# Altium PCB AD9959-pcb.PcbDoc (part 1 of 2)
Units mil, origin at the board's own origin, x right, y up, seen from the top; angles counter-clockwise.
Board outline 3551.25 x 2369.11 mil, 2 copper layers (Top Layer, Bottom Layer); 146 components, 90 nets, 422 pads, 640 vias.
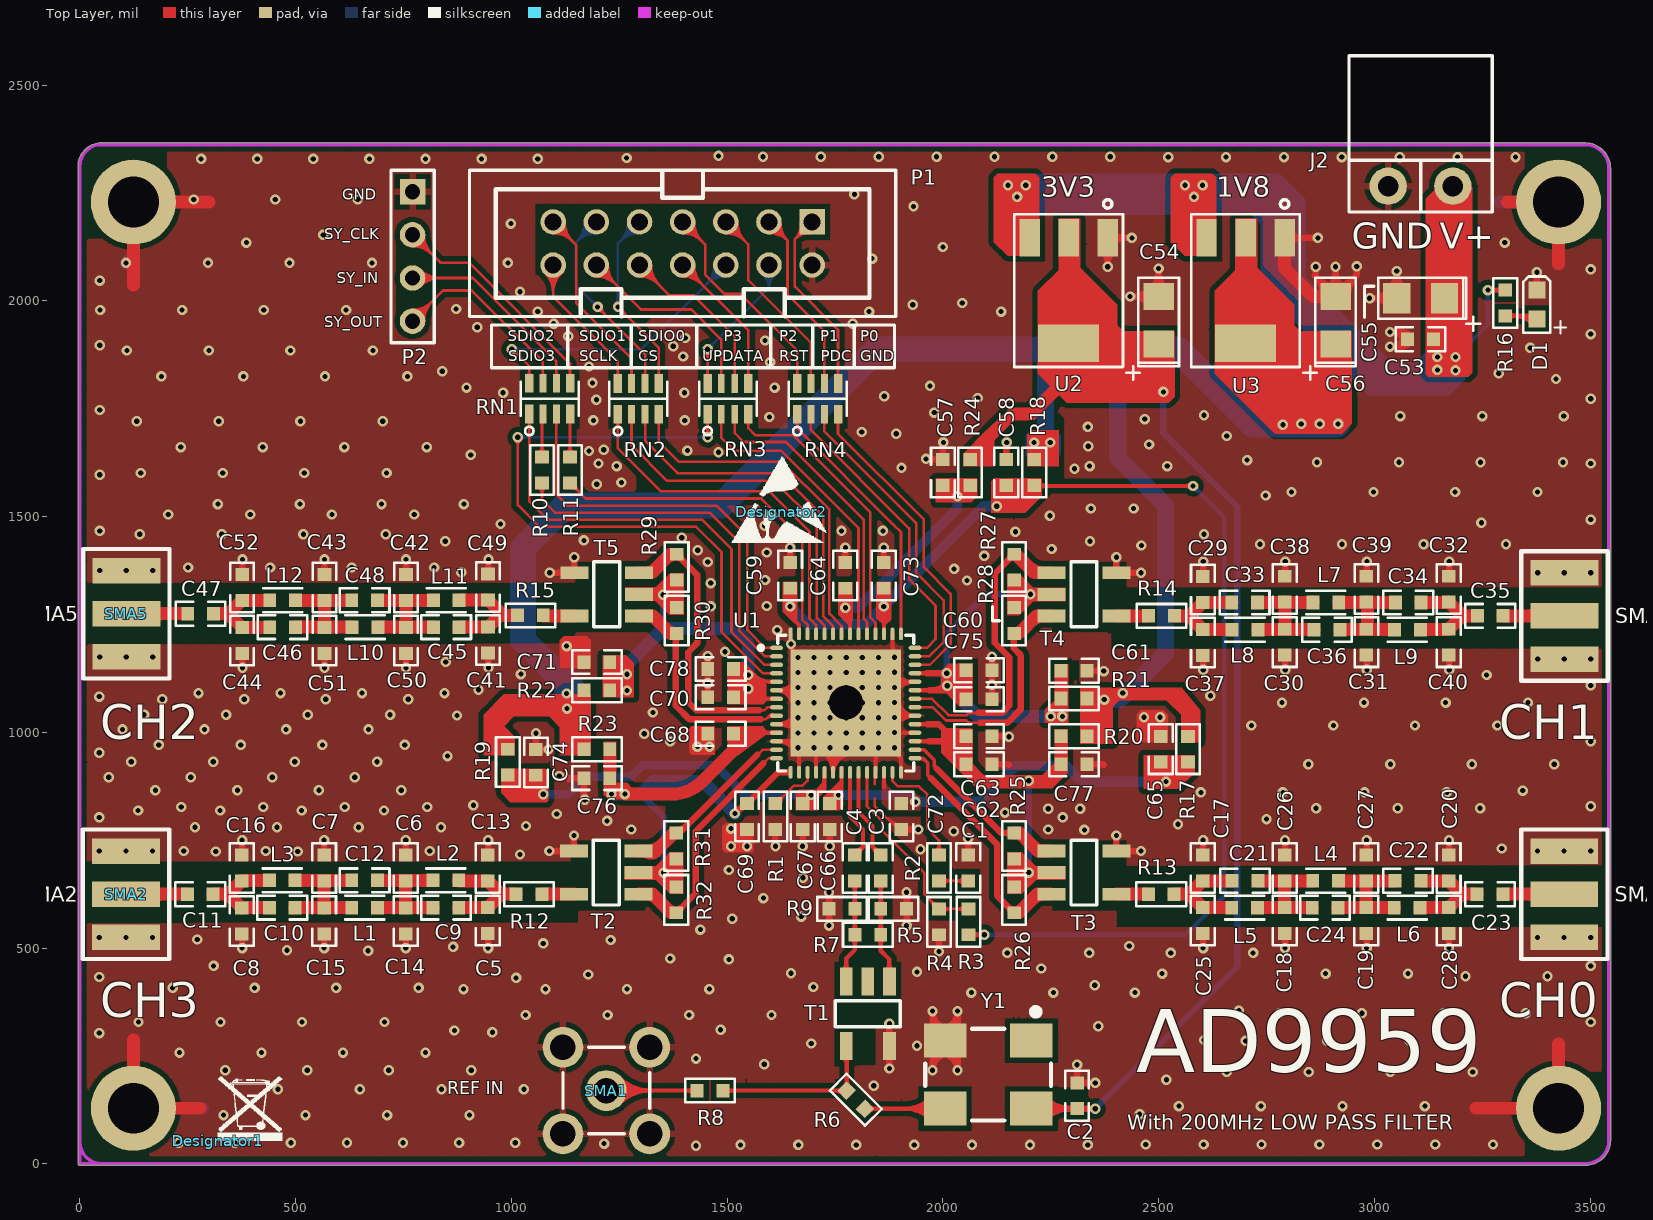
[diagram p0: Top Layer view]
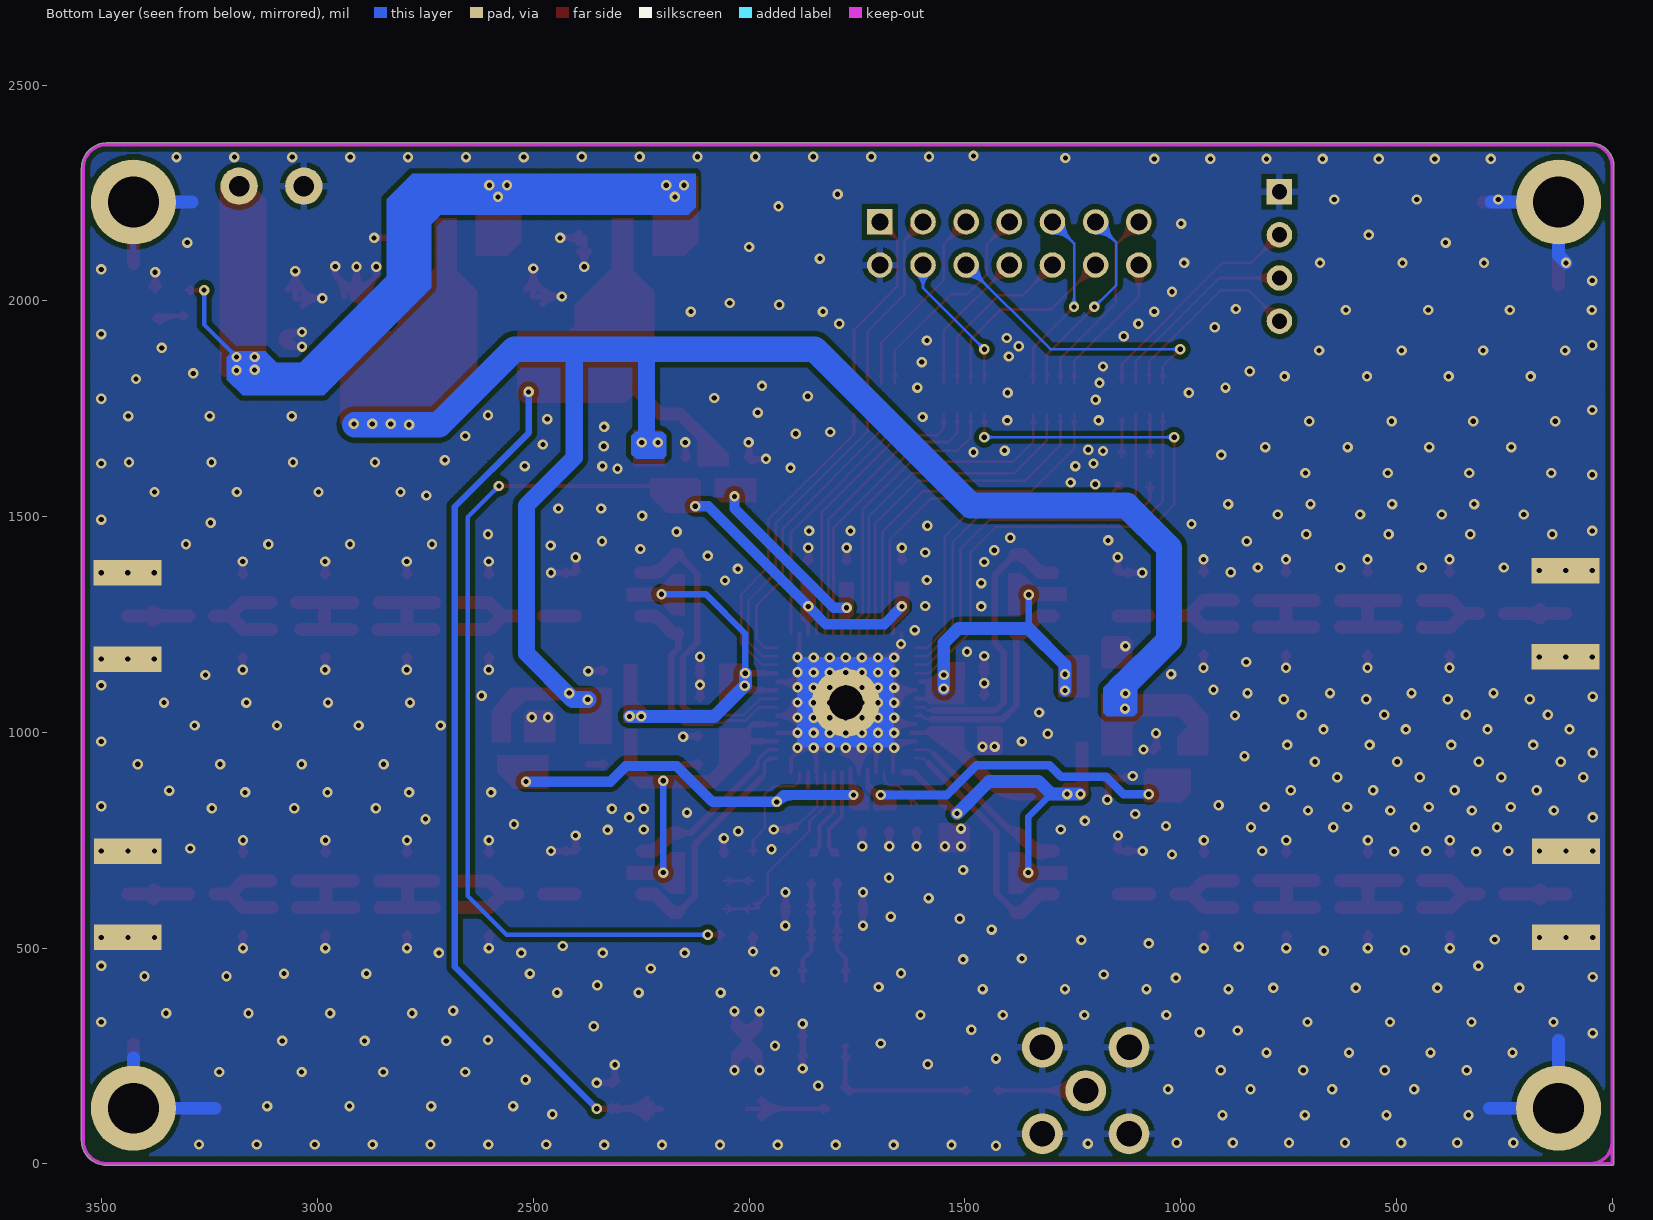
[diagram p1: Bottom Layer view, seen from below]

## Layer stack, top to bottom
Top Solder: solder mask 0.4, Solder Resist, Dk 3.5
Top Layer: signal copper 1.4
Dielectric1: dielectric 12.6, FR-4, Dk 4.8
Bottom Layer: signal copper 1.4
Bottom Solder: solder mask 0.4, Solder Resist, Dk 3.5

## Board outline
-3.95,1 -3.95,2310 cw(c0,2310) -3.8,2311.1 cw(c0,2312.2) -3.95,2312.2 cw(c50,2312.2) 50,2366.16 cw(c50,2362.2) 51.1,2366 cw(c52.2,2362.2) 52.2,2366.16 3487.8,2366.16 cw(c3487.8,2362.2) 3488.9,2366 cw(c3490,2362.2) 3490.14,2366.15 cw(c3488.05,2306.95) 3547.29,2306.95 cw(c3488.05,2306.95) 3547.26,2304.93 3547.26,55.01 cw(c3489.65,54.65) 3547.26,54.65 cw(c3489.65,54.65) 3490.03,-2.95 cw(c3490,1) 3490,-2.95 0,-2.95 cw(c0,1)

## Design rules (kind name [scope] priority, off if disabled: settings)
Clearance Clearance_POLY [inpolygon] p1: gap=12 ignorepadtopadclearanceinfootprint=FALSE except(0: Arc-Hole Track-Hole SMDPad-Hole THPad-Hole Via-Hole Fill-Hole Poly-Hole Region-Hole Text-Hole)
Clearance [All] p2: gap=6 ignorepadtopadclearanceinfootprint=FALSE except(0: Arc-Hole Track-Hole SMDPad-Hole THPad-Hole Via-Hole Fill-Hole Poly-Hole Region-Hole Text-Hole)
PolygonConnect PolygonConnect_direct [isvia or InSMTComponent] p1: connectstyle=Direct reliefconductorwidth=10 reliefentries=4 polygonreliefangle="90 Angle" airgapwidth=10
PolygonConnect [All] p2: connectstyle=Relief reliefconductorwidth=15 reliefentries=4 polygonreliefangle="90 Angle" airgapwidth=10
RoomDefinition QFN [InComponentClass('Components Class 1')] p1: confinementstyle=ConfineIn formatcopy=TRUE lockcomponents=FALSE outline 1462,1367 2089,1367 2089,812 1462,812
RoutingVias [All] p1: holewidth=12 width=24 viastyle="Through Hole" minholewidth=12 minwidth=24 maxholewidth=12 maxwidth=24
SilkToSolderMaskClearance SilkscreenOverComponentPads [IsPad] p1: minsilkscreentomaskgap=10 clearancetoexposedcopper=TRUE
SolderMaskExpansion [All] p1: expansion=2.5 istentingtop=FALSE
Width Width_POWER [InNetClass('POWER')] p1: maxlimit=60 minlimit=6 preferedwidth=15
Width [All] p2: maxlimit=60 minlimit=6 preferedwidth=6
29 further rules are at their usual default settings.

## Classes and differential pairs
component class "Components Class 1": U1
component class "Room Definition 4": C17 C18 C19 C20 C21 C22 C23 C24 C25 C26 C27 C28 L4 L5 L6 R13 R25 R26 SMA3 T3
component class "Room Definition 3": C41 C42 C43 C44 C45 C46 C47 C48 C49 C50 C51 C52 L10 L11 L12 R15 R29 R30 SMA5 T5
component class "Room Definition 2": C29 C30 C31 C32 C33 C34 C35 C36 C37 C38 C39 C40 L7 L8 L9 R14 R27 R28 SMA4 T4
component class "Room Definition 1": C5 C6 C7 C8 C9 C10 C11 C12 C13 C14 C15 C16 L1 L2 L3 R12 R31 R32 SMA2 T2
net class POWER: AGND AVDD0 AVDD1 AVDD2 AVDD3 BG_VDD CLK_VDD DVDD DVDD/IO VCC_1V8 VCC_3V3 VIN
component class 04-POWER: C53 C54 C55 C56 C57 C58 C59 C60 C61 C62 C63 C64 C65 C66 C67 C68 C69 C70 C71 C72 C73 C74 C75 C76 C77 C78 D1 J2 R16 R17 R18 R19 R20 R21 R22 R23 R24 R25 R26 R27 R28 R29 R30 R31 R32 U2 U3
component class "03-LP Filter": C17 C18 C19 C20 C21 C22 C23 C24 C25 C26 C27 C28 C29 C30 C31 C32 C33 C34 C35 C36 C37 C38 C39 C40 C41 C42 C43 C44 C45 C46 C47 C48 C49 C50 C51 C52 L4 L5 L6 L7 L8 L9 L10 L11 L12 R13 R14 R15 SMA3 SMA4 SMA5 T3 T4 T5
component class 02-I_O: C5 C6 C7 C8 C9 C10 C11 C12 C13 C14 C15 C16 L1 L2 L3 P1 P2 R10 R11 R12 RN1 RN2 RN3 RN4 SMA2 T2
component class 01-MCU: C1 C2 C3 C4 R1 R2 R3 R4 R5 R6 R7 R8 R9 SMA1 T1 U1 Y1

## Components (designator, comment, footprint, x,y, rotation, side; value= is the part's Value field where it differs from the comment)
C1 "680pf" 0603C 2058.56,685.92 r90 top
C2 "100nf" 0603C 2311,157.92 r270 top
C3 "100nf" 0603C 1856,685.92 r90 top
C4 "100nf" 0603C 1796,685.92 r90 top
C5 "8.2pF" 0603C 945.08,564 r90 top
C6 "12pF" 0603C 755.08,686 r270 top
C7 "10pF" 0603C 566.08,686 r270 top
C8 "5pF" 0603C 375.08,563.08 r90 top
C9 "0.75pF" 0603C 848.16,594 r180 top
C10 "10pF" 0603C 469.08,594 r180 top
C11 "1uF" 0603C 279.08,625 r180 top
C12 "5pF" 0603C 660.08,657 r180 top
C13 "8.2pF" 0603C 945.08,686 r90 top
C14 "12pF" 0603C 755.08,563.08 r90 top
C15 "10pF" 0603C 566.08,563.08 r90 top
C16 "5pF" 0603C 375.08,686 r270 top
C17 "8.2pF" 0603C 2602,686 r270 top
C18 "12pF" 0603C 2792,564 r90 top
C19 "10pF" 0603C 2981,564 r90 top
C20 "5pF" 0603C 3172,686 r270 top
C21 "0.75pF" 0603C 2699.92,656 r0 top
C22 "10pF" 0603C 3078,656 r0 top
C23 "1uF" 0603C 3268,625 r0 top
C24 "5pF" 0603C 2885.92,594 r0 top
C25 "8.2pF" 0603C 2602,564 r270 top
C26 "12pF" 0603C 2792,686 r270 top
C27 "10pF" 0603C 2981,686 r270 top
C28 "5pF" 0603C 3172,564 r90 top
C29 "8.2pF" 0603C 2602.51,1331 r270 top
C30 "12pF" 0603C 2792.51,1209 r90 top
C31 "10pF" 0603C 2981.51,1209 r90 top
C32 "5pF" 0603C 3172.51,1331.92 r270 top
C33 "0.75pF" 0603C 2699.43,1301 r0 top
C34 "10pF" 0603C 3078.51,1301 r0 top
C35 "1uF" 0603C 3268.51,1270 r0 top
C36 "5pF" 0603C 2889.92,1238 r0 top
C37 "8.2pF" 0603C 2602.51,1208.08 r270 top
C38 "12pF" 0603C 2792.51,1331.92 r270 top
C39 "10pF" 0603C 2981.51,1331.92 r270 top
C40 "5pF" 0603C 3172.51,1209 r90 top
C41 "8.2pF" 0603C 945.95,1214 r90 top
C42 "12pF" 0603C 755.95,1336 r270 top
C43 "10pF" 0603C 566.95,1336 r270 top
C44 "5pF" 0603C 375.95,1213.08 r90 top
C45 "0.75pF" 0603C 849.03,1244 r180 top
C46 "10pF" 0603C 469.95,1244 r180 top
C47 "1uF" 0603C 279.95,1275 r180 top
C48 "5pF" 0603C 660.08,1306 r180 top
C49 "8.2pF" 0603C 945.95,1336.92 r90 top
C50 "12pF" 0603C 755.95,1213.08 r90 top
C51 "10pF" 0603C 566.95,1213.08 r90 top
C52 "5pF" 0603C 375.95,1336 r270 top
C53 "100nf" 0603C 3107,1911 r180 top
C54 "22uF" 1206T 2500,1955 r90 top
C55 "22uF" 1206T 3107,2006 r180 top
C56 "22uF" 1206T 2910,1955 r90 top
C57 "100nf" 0603C 2000,1602 r90 top
C58 "100nf" 0603C 2147,1602 r90 top
C59 "100nf" 0603C 1646,1363.92 r90 top
C60 "100nf" 0603C 2083.92,1144 r0 top
C61 "100nf" 0603C 2303.92,1143 r0 top
C62 "100nf" 0603C 2083.92,926 r0 top
C63 "100nf" 0603C 2083.92,991 r0 top
C64 "100nf" 0603C 1774,1363.92 r90 top
C65 "100nf" 0603C 2505,961 r90 top
C66 "100nf" 0603C 1738,805 r270 top
C67 "100nf" 0603C 1675,805 r270 top
C68 "100nf" 0603C 1485.08,997 r180 top
C69 "100nf" 0603C 1546,805 r270 top
C70 "100nf" 0603C 1485.08,1081.51 r180 top
C71 "100nf" 0603C 1198.08,1163 r180 top
C72 "100nf" 0603C 1904,805 r270 top
C73 "100nf" 0603C 1863,1363.92 r90 top
C74 "100nf" 0603C 1057,930.57 r90 top
C75 "100nf" 0603C 2083.92,1077 r0 top
C76 "100nf" 0603C 1198.08,894 r180 top
C77 "100nf" 0603C 2303.92,926 r0 top
C78 "100nf" 0603C 1485.08,1147 r180 top
D1 "LED" 0603D 3376.49,1991.51 r270 top
Designator1 "Comment" 0-WEEE 320,54 r0 top
Designator2 "Comment" "0-ESD Protect" 1626,1511 r0 top
J2 "PWR_IN" KF2EDG_3R81_2P 3107,2266 r0 top
L1 "47nH" 0603L 660.08,594 r180 top
L2 "56nH" 0603L 848.08,657 r180 top
L3 "33nH" 0603L 469.08,657 r180 top
L4 "47nH" 0603L 2887,656 r0 top
L5 "56nH" 0603L 2699.41,594 r0 top
L6 "33nH" 0603L 3076,594 r0 top
L7 "47nH" 0603L 2887.51,1301 r0 top
L8 "56nH" 0603L 2700,1238 r0 top
L9 "33nH" 0603L 3076.51,1238 r0 top
L10 "47nH" 0603L 660.95,1244 r180 top
L11 "56nH" 0603L 849.08,1306 r180 top
L12 "33nH" 0603L 470.08,1306 r180 top
P1 "Header 7X2" CON20VP2R54-2X7TM-1 1397,2133 r180 top
P2 "Header 4" HDR1X4 771,2253 r270 top
R1 "1.8K" 0603R 1612,805 r90 top
R2 "0R" 0603R 1991,685.92 r270 top
R3 "0R" 0603R 2059.46,561 r90 top
R4 "NC" 0603R 1991,561 r90 top
R5 "24.9R" 0603R 1885.92,590.92 r0 top
R6 "0R" 0603R 1798.16,148.84 r135 top
R7 "49.9R" 0603R 1826.08,531.08 r0 top
R8 "0R" 0603R 1460.08,170 r0 top
R9 "24.9R" 0603R 1766.08,590.92 r0 top
R10 "0R" 0603R 1071,1608.08 r270 top
R11 "0R" 0603R 1136,1608 r270 top
R12 "0R" 0603R 1041,625 r180 top
R13 "0R" 0603R 2506.08,625 r0 top
R14 "0R" 0603R 2506.59,1270 r0 top
R15 "0R" 0603R 1044,1271 r180 top
R16 "510R" 0603R 3303,1995.08 r90 top
R17 "0R" 0603R 2568,961 r90 top
R18 "0R" 0603R 2212,1602 r90 top
R19 "0R" 0603R 992,931 r90 top
R20 "0R" 0603R 2303.92,991 r0 top
R21 "0R" 0603R 2303.92,1078.49 r0 top
R22 "0R" 0603R 1198.08,1097.56 r180 top
R23 "0R" 0603R 1198.08,961 r180 top
R24 "0R" 0603R 2063,1602 r90 top
R25 "49.9R" 0603R 2165,736.92 r90 top
R26 "49.9R" 0603R 2165,612 r270 top
R27 "49.9R" 0603R 2165,1382.92 r90 top
R28 "49.9R" 0603R 2165,1259.08 r270 top
R29 "49.9R" 0603R 1382.95,1382.92 r90 top
R30 "49.9R" 0603R 1382.95,1259.08 r270 top
R31 "49.9R" 0603R 1382.08,736.92 r90 top
R32 "49.9R" 0603R 1382.08,612 r270 top
RN1 "51r" 0603RA 1088.76,1773.43 r0 top
RN2 "51r" 0603RA 1294.11,1773 r0 top
RN3 "51r" 0603RA 1501.96,1773 r0 top
RN4 "51r" 0603RA 1709.81,1773 r0 top
SMA1 "REF CLK" CON10-5R1X5R1 1220,170 r0 top
SMA2 "CH3" SMA-SMD 107.08,625 r270 top
SMA3 "CH0" SMA-SMD 3440,625 r90 top
SMA4 "CH1" SMA-SMD 3440.51,1270 r90 top
SMA5 "CH2" SMA-SMD 107.95,1275 r270 top
T1 "ETC1-1-13" SM-22 1826,348 r180 top
T2 "TC1-1T+" at224-1a 1220.08,675 r270 top
T3 "TC1-1T+" at224-1a 2327,675 r90 top
T4 "TC1-1T+" at224-1a 2327,1320 r90 top
T5 "TC1-1T+" at224-1a 1220.95,1320 r270 top
U1 "AD9958PCBZ" QFN50P800X800X100-56M 1775,1068 r0 top
U2 "AMS1117-3V3" SOT223 2291.45,2023.95 r180 top
U3 "AMS1117-1V8" SOT223 2701.45,2023.95 r180 top
Y1 "100MHz" XTAL-SMD-7050_4P 2105,206.74 r180 top

## Footprints (in the part's own frame and the unit in brackets; to place one, negate y for a bottom-side part, rotate by r counter-clockwise, add the part's x,y. Pads: shape width x height; smd on the part's side, far side on the other; paste and mask are expansions set on the pad)
"0-ESD Protect" [mil]
  silkscreen extent -115,-70 104,128
0-WEEE [mil] "WEEE"
  silkscreen extent 0,0 150,148
0603C [mm]
  rect 0.76x0.8 smd: 1(-0.76,0) 2(0.76,0)
  silkscreen extent -1.46,-0.7 1.46,0.7
0603D [mm]
  rect 1x1 smd: 1(0.85,0) 2(-0.85,0)
  silkscreen extent -1.65,-0.8 1.65,0.8
0603L [mm]
  rect 0.76x0.8 smd: 1(-0.76,0) 2(0.76,0)
  silkscreen extent -1.15,-0.7 1.15,0.7
0603R [mm]
  rect 0.76x0.8 smd: 1(-0.76,0) 2(0.76,0)
  silkscreen extent -1.46,-0.7 1.46,0.7
0603RA [mm]
  rect 0.5x1.1 smd: 1(-1.2,-0.9) 4(1.2,-0.9) 5(1.2,0.9) 8(-1.2,0.9)
  rect 0.4x1.1 smd: 2(-0.4,-0.9) 3(0.4,-0.9) 6(0.4,0.9) 7(-0.4,0.9)
  silkscreen extent -1.7,-2.15 1.7,1
1206T [mm]
  rect 1.6x1.8 smd: 1(-1.4,0) 2(1.4,0)
  silkscreen extent -3.5,-1.2 2.5,1.9
at224-1a [mm] "RF Transformer"
  rect 0.76x1.65 smd: 1(-1.27,1.905) 2(0,1.905) 3(1.27,1.905) 4(-1.27,-1.905) 6(1.27,-1.905)
  silkscreen extent -1.91,-0.76 1.91,0.76
CON10-5R1X5R1 [mm]
  round 2.4 hole 1.5: 1(0,0) 2(-2.55,2.55) 3(-2.55,-2.55) 4(2.55,2.55) 5(2.55,-2.55)
  silkscreen extent -2.55,-2.55 2.55,2.55
CON20VP2R54-2X7TM-1 [mm]
  rect 1.5x1.5 hole 1: 1(-7.62,-1.27)
  round 1.5 hole 1: 2(-7.62,1.27) 3(-5.08,-1.27) 4(-5.08,1.27) 5(-2.54,-1.27) 6(-2.54,1.27) 7(0,-1.27) 8(0,1.27) 9(2.54,-1.27) 10(2.54,1.27) 11(5.08,-1.27) 12(5.08,1.27) 13(7.62,-1.27) 14(7.62,1.27)
  silkscreen extent -12.55,-4.3 12.55,4.3
HDR1X4 [mm] "Connector; Header; 4 Position"
  rect 1.5x1.5 hole 0.9: 1(0,0)
  round 1.5 hole 0.9: 2(2.54,0) 3(5.08,0) 4(7.62,0)
  silkscreen extent -1.27,-1.27 8.89,1.27
KF2EDG_3R81_2P [mm]
  round 2.2 hole 1.2: 1(-1.905,0) 2(1.905,0)
  silkscreen extent -4.21,-1.52 4.21,7.68
QFN50P800X800X100-56M [mm] "QFN, 56-Leads, Body 8.0x8.0mm (max), Pitch 0.50mm, IPC Low Density"
  oval 0.75x0.25 smd: 1(-4.075,3.25) 2(-4.075,2.75) 3(-4.075,2.25) 4(-4.075,1.75) 5(-4.075,1.25) 6(-4.075,0.75) 7(-4.075,0.25) 8(-4.075,-0.25) 9(-4.075,-0.75) 10(-4.075,-1.25) 11(-4.075,-1.75) 12(-4.075,-2.25) 13(-4.075,-2.75) 14(-4.075,-3.25) 29(4.075,-3.25) 30(4.075,-2.75) 31(4.075,-2.25) 32(4.075,-1.75) 33(4.075,-1.25) 34(4.075,-0.75) 35(4.075,-0.25) 36(4.075,0.25) 37(4.075,0.75) 38(4.075,1.25) 39(4.075,1.75) 40(4.075,2.25) 41(4.075,2.75) 42(4.075,3.25)
  oval 0.25x0.75 smd: 15(-3.25,-4.075) 16(-2.75,-4.075) 17(-2.25,-4.075) 18(-1.75,-4.075) 19(-1.25,-4.075) 20(-0.75,-4.075) 21(-0.25,-4.075) 22(0.25,-4.075) 23(0.75,-4.075) 24(1.25,-4.075) 25(1.75,-4.075) 26(2.25,-4.075) 27(2.75,-4.075) 28(3.25,-4.075) 43(3.25,4.075) 44(2.75,4.075) 45(2.25,4.075) 46(1.75,4.075) 47(1.25,4.075) 48(0.75,4.075) 49(0.25,4.075) 50(-0.25,4.075) 51(-0.75,4.075) 52(-1.25,4.075) 53(-1.75,4.075) 54(-2.25,4.075) 55(-2.75,4.075) 56(-3.25,4.075)
  rect 6.5x6.3 smd: 57(0,0)
  silkscreen extent -5.12,-4 4,4, body extent -4,-4 4,4, height 1
SM-22 [mm] "RF Transformer"
  rect 0.76x1.65 smd: 1(-1.27,-1.905) 2(0,-1.905) 3(1.27,-1.905) 4(1.27,1.905) 5(-1.27,1.905)
  silkscreen extent -1.91,-0.76 1.91,0.76
SMA-SMD [mm]
  rect 1.5x4 smd: 1(0,0) 2(-2.54,0) 2(2.54,0)
  rect 1.5x4 smd far side: 2(-2.54,0) 2(2.54,0)
  silkscreen extent -3.81,-2.54 3.81,2.54, body extent -3,-11.89 3,1.71, height 3.2
SOT223 [mm]
  rect 1.2x2.2 smd: 1(-2.3,-3.1) 2(0,-3.1) 3(2.3,-3.1)
  rect 3.6x2.2 smd: 4(0,3.1)
  silkscreen extent -3.2,-5.35 3.2,4.5
XTAL-SMD-7050_4P [mm]
  rect 2.5x2 smd: 1(-2.54,-2) 2(2.54,-2) 3(2.54,2) 4(-2.54,2)
  silkscreen extent -3.7,-3.9 3.7,2.7

## Part data
C1 C2 C3 C4 C5 C6 C7 C8 C9 C10 C11 C12 C13 C14 C15 C16 C17 C18 C19 C20 C21 C22 C23 C24 C25 C26 C27 C28 C29 C30 C31 C32 C33 C34 C35 C36 C37 C38 C39 C40 C41 C42 C43 C44 C45 C46 C47 C48 C49 C50 C51 C52 C53 C57 C58 C59 C60 C61 C62 C63 C64 C65 C66 C67 C68 C69 C70 C71 C72 C73 C74 C75 C76 C77 C78: library part "CAP NP"
C54 C55 C56: library part "CAP POL"
J2: library part "HEADER 2"
L1 L2 L3 L4 L5 L6 L7 L8 L9 L10 L11 L12: library part INDUCTANCE
P1: "Header, 7-Pin, Dual row"
P2: "Header, 4-Pin"
R1 R2 R3 R4 R5 R6 R7 R8 R9 R10 R11 R12 R13 R14 R15 R16 R17 R18 R19 R20 R21 R22 R23 R24 R25 R26 R27 R28 R29 R30 R31 R32: library part R
RN1 RN2 RN3 RN4: library part R_PACK_4
SMA1 SMA2 SMA3 SMA4 SMA5: library part BNC
U1: library part AD9958BCPZ_2
U3: library part AMS1117-3V3
Y1: library part XTAL_SMD

## Free pads (board coordinates)
  round 196.85 hole 118.11: 0(124,129) 0(124,2229) 0(3427,129) 0(3427,2229)
  round 157.48 hole 78.74: 0(1775.92,1068.74)

## Via types
v1: diameter 24, hole 12, Top Layer to Bottom Layer, tented both sides, 640 vias

## Nets (pads, with @x,y where several pads share a name; then routed paths per layer and width w, separated by ;. In a path a pad name is that pad's centre, name@x,y a point inside that pad or via, vN(x,y) a via of type N, cw(c..) or ccw(c..) an arc to the next point about the centre after c; other vN are vias at no path point)
AGND: C1.2 C2.1 C5.1 C6.1 C7.1 C8.1 C13.2 C14.1 C15.1 C16.1 C17.1 C18.1 C19.1 C20.1 C25.2 C26.1 C27.1 C28.1 C29.1 C30.1 C31.1 C32.1 C37.2 C38.1 C39.1 C40.1 C41.1 C42.1 C43.1 C44.1 C49.2 C50.1 C51.1 C52.1 C53.2 C54.2 C55.2 C56.2 C57.2 C58.2 C59.2 C60.2 C61.2 C62.2 C63.2 C64.2 C65.2 C66.2 C67.2 C68.2 C69.2 C70.2 C71.2 C72.2 C73.2 C74.2 C75.2 C76.2 C77.2 C78.2 D1.2 J2.1 P1.2 P2.1 pad.0 R1.1 R4.1 R5.2 R9.1 SMA1.2 SMA1.3 SMA1.4 SMA1.5 SMA2.2 SMA3.2 SMA4.2 SMA5.2 T1.5 T2.4 T3.6 T4.6 T5.4 U1.6 U1.10 U1.12 U1.16 U1.18 U1.20 U1.25 U1.28 U1.32 U1.34 U1.38 U1.44 U1.56 U1.57 U2.1 U3.1 Y1.2 | length 21847.1
  Top Layer w6: 1841.71,880 1841.71,905.38 U1.25@1843.9,907.57 ; 1841.71,887.81 cw(c1853.81,887.81) U1.25@1845.26,896.37 ; 1842.06,847 1842.06,829.94 1896.92,775.08 C72.2@1904,775.08 ; 1872.05,799.95 ccw(c1903.21,831.1) C72.2@1903.21,787.04 ; 1882.3,789.7 ccw(c1903.21,810.62) C72.2@1903.21,781.04 ; 1887.24,784.76 cw(c1877.56,775.08) C72.2@1891.25,775.08
  Top Layer w10: U1.6@1625.11,1097.53 cw(c1625.11,1060.39) U1.57@1662.2,1062.32 ; 1630.31,1097.53 cw(c1630.31,1000.43) U1.57@1718.21,1041.67 ; 1632.06,1097.53 ccw(c1632.06,1149.79) U1.57@1677.11,1123.29 ; 1632.18,1097.53 ccw(c1632.18,1135.52) U1.57@1659.05,1108.66 ; 1635.64,1097.53 cw(c1635.64,1060.94) U1.57@1672.18,1062.84 ; 1636.99,1018.79 cw(c1636.99,947.62) U1.57@1689.95,995.17 ; 1637.04,979.42 cw(c1637.04,940.13) U1.57@1666.23,966.43 ; 1637.06,1018.79 ccw(c1637.06,1058.07) U1.57@1666.23,1031.76 ; 1646.05,1097.53 cw(c1646.05,1007.82) U1.57@1727.26,1045.92 ; 1646.18,1097.53 cw(c1646.18,1061.49) U1.57@1682.17,1063.36 ; U1.56@1647.05,1228.43 1647.05,1195.95 U1.57@1775,1068 1902.95,940.05 U1.28@1902.95,907.57 ; v1@1647.88,1195.12 ccw(c1774.97,1322.21) U1.57@1775.64,1142.48 ; U1.57@1648.19,979.42 cw(c1648.19,911.3) 1696.36,959.47 cw(c1672.83,935.94) 1706.1,935.94 ; U1.57@1648.23,1018.79 ccw(c1648.23,1086.84) U1.57@1696.36,1038.72 ; v1@1648.26,1194.74 cw(c1627.17,1173.64) U1.57@1657,1173.64 ; U1.57@1649.55,1097.53 ccw(c1649.55,1139.5) U1.57@1685.73,1118.22 ; U1.57@1651.21,1191.79 cw(c1528.15,1068.74) U1.57@1702.18,1068.74 ; U1.57@1652.21,1061.8 ccw(c1614.57,1059.84) U1.6@1614.57,1097.53 ; U1.57@1653.33,971.84 cw(c1667.83,961.76) U1.57@1667.83,979.42 ; U1.57@1653.33,1026.34 ccw(c1667.8,1036.42) U1.57@1667.8,1018.79 ; U1.57@1655.59,1187.41 cw(c1605.91,1137.73) U1.57@1670.63,1110.4 ; U1.57@1656.09,1186.91 ccw(c1707.59,1238.41) U1.57@1733.01,1170.16 ; U1.57@1658.8,959.73 ccw(c1614.57,919.89) U1.12@1614.57,979.42 1706.1,979.42 ccw(c1706.1,935.14) U1.57@1669.75,960.42 ; U1.57@1658.8,1038.46 cw(c1614.57,1078.35) U1.10@1614.57,1018.79 ; U1.57@1659.05,959.47 cw(c1640.5,940.92) 1666.73,940.92 ; U1.57@1659.05,969.37 ccw(c1640.5,987.91) U1.57@1666.73,987.91 ; U1.57@1659.05,993.85 cw(c1640.5,975.31) U1.57@1666.73,975.31 ; U1.57@1659.51,979.42 cw(c1659.51,960.37) U1.57@1673.66,973.12 ; U1.57@1659.54,1018.79 ccw(c1659.54,1037.79) U1.57@1673.65,1025.06 ; U1.57@1661.42,1114.29 ccw(c1591.14,1143.97) 1645.08,1197.92 ccw(c1701.61,1254.45) U1.57@1729.52,1179.53 ; U1.57@1661.54,966.13 cw(c1686.96,948.45) U1.57@1686.96,979.42 ; U1.57@1661.54,1032.06 ccw(c1686.95,1049.75) U1.57@1686.95,1018.79 ; U1.57@1661.78,1097.53 cw(c1661.78,1015.2) U1.57@1736.32,1050.16 ; U1.57@1664,1166.64 cw(c1664,1136.81) U1.57@1685.1,1157.9 ; U1.57@1664.86,1178.14 ccw(c1775.1,1288.37) U1.57@1775.68,1132.48 ; U1.57@1666.09,1176.91 cw(c1620.68,1131.5) U1.57@1679.85,1106.52 ; U1.16@1666.73,907.57 U1.57@1666.73,999.1 ; U1.57@1667.1,1175.9 ccw(c1713.56,1222.36) U1.57@1736.5,1160.79 ; U1.57@1667.4,1097.53 ccw(c1667.4,1177.26) U1.57@1723.77,1120.88 ; U1.57@1668.28,1174.72 cw(c1562.29,1068.74) U1.57@1712.18,1068.74 ; U1.57@1668.49,1128.36 cw(c1614.57,1160.08) U1.6@1614.57,1097.53 ; U1.57@1668.95,1108.66 ccw(c1695.82,1135.52) U1.57@1695.82,1097.53 ; U1.57@1669.49,1097.53 ccw(c1669.49,1135.52) U1.57@1696.36,1108.66 ; U1.57@1669.74,1037.77 ccw(c1706.1,1063.09) 1706.1,1018.79 U1.10@1614.57,1018.79 ; U1.57@1672.34,979.42 cw(c1672.34,935.45) U1.57@1703.43,966.54 ; U1.57@1672.38,1018.79 ccw(c1672.38,1062.7) U1.57@1703.43,1031.65 ; U1.57@1676.6,1166.4 cw(c1635.45,1125.26) U1.57@1689.06,1102.63 ; U1.57@1677.52,1097.53 cw(c1677.52,1022.58) U1.57@1745.37,1054.41 ; U1.57@1678.11,1164.89 ccw(c1719.54,1206.32) U1.57@1739.99,1151.42 ; U1.57@1681.84,1161.16 ccw(c1775.22,1254.54) U1.57@1775.72,1122.48 ; U1.57@1682.51,988.48 ccw(c1614.57,927.49) U1.10@1614.57,1018.79 ; U1.57@1685.35,1157.65 cw(c1596.43,1068.74) U1.57@1722.18,1068.74 ; U1.57@1686.91,983.84 cw(c1640.56,937.5) 1706.1,937.5 ; U1.57@1687.22,1155.78 cw(c1670.12,1138.67) U1.57@1694.31,1138.67 ; U1.57@1691.54,1097.53 ccw(c1691.54,1153.12) U1.57@1730.85,1113.81 ; U1.57@1693.25,1097.53 cw(c1693.25,1029.96) U1.57@1754.42,1058.66 ; U1.57@1693.98,990.91 cw(c1664.7,961.64) U1.57@1706.1,961.64 ; U1.57@1696.36,969.37 ccw(c1672.83,992.9) U1.57@1706.1,992.9 ; U1.57@1696.36,993.85 cw(c1672.83,970.32) U1.57@1706.1,970.32 ; U1.57@1696.48,979.42 cw(c1696.48,959.59) U1.57@1710.5,973.61 ; U1.57@1696.52,1018.79 ccw(c1696.52,1038.56) U1.57@1710.5,1024.58 ; U1.57@1698.82,1144.18 ccw(c1775.35,1220.7) U1.57@1775.75,1112.48 ; U1.57@1701.31,1131.67 cw(c1701.31,1107.49) U1.57@1718.41,1124.59 ; U1.57@1702.42,1140.58 cw(c1630.58,1068.74) U1.57@1732.18,1068.74 ; U1.18@1706.1,907.57 U1.57@1706.1,999.1 ; U1.57@1706.1,1097.53 U1.6@1614.57,1097.53 ; U1.57@1709.16,1037.42 ccw(c1614.57,993.05) U1.6@1614.57,1097.53 ; U1.57@1711.2,965.13 cw(c1676.53,905.55) 1745.47,905.55 cw(c1790.02,905.54) U1.57@1784.85,949.79 ; U1.57@1715.81,1127.19 ccw(c1775.48,1186.86) U1.57@1775.79,1102.48 ; U1.57@1716.23,973.78 cw(c1686.65,922.93) 1745.47,922.93 ; U1.57@1721.26,982.42 cw(c1696.77,940.32) 1745.47,940.32 ; U1.57@1723.77,1016.6 cw(c1671.39,964.21) U1.57@1745.47,964.21 ; U1.57@1726.18,1116.82 cw(c1713.07,1103.71) U1.57@1731.61,1103.71 ; U1.57@1727.83,1115.17 ccw(c1738.61,1125.96) U1.57@1738.61,1110.71 ; U1.57@1730.85,1023.67 cw(c1695.53,988.36) U1.57@1745.47,988.36 ; U1.57@1733.66,959.47 cw(c1705.15,930.95) 1745.47,930.95 ; U1.57@1733.66,969.37 ccw(c1705.15,997.88) U1.57@1745.47,997.88 ; U1.57@1733.66,993.85 cw(c1705.15,965.34) U1.57@1745.47,965.34 ; U1.57@1738.61,1096.71 cw(c1738.61,1078.16) U1.57@1751.73,1091.27 ; U1.20@1745.47,904.72 cw(c1852.93,904.72) U1.57@1807.26,1001.99 ; U1.20@1745.47,907.57 U1.57@1745.47,999.1 ; U1.20@1745.47,916.78 cw(c1788.7,916.78) U1.57@1783.7,959.72 ; U1.20@1745.47,920.46 cw(c1845.54,920.46) U1.57@1803.01,1011.04 ; 1745.47,928.01 cw(c1787.39,928.01) U1.57@1782.54,969.65 ; 1745.47,936.21 cw(c1838.15,936.21) U1.57@1798.76,1020.09 ; 1745.47,939.25 cw(c1786.08,939.25) U1.57@1781.38,979.58 ; U1.57@1745.47,951.95 cw(c1830.75,951.95) U1.57@1794.51,1029.15 ; U1.57@1745.47,967.69 cw(c1823.36,967.69) U1.57@1790.26,1038.2 ; U1.57@1745.47,983.44 cw(c1815.97,983.44) U1.57@1786.01,1047.25 ; U1.57@1745.61,1103.71 ccw(c1760.86,1103.71) U1.57@1750.08,1092.92 ; U1.57@1761.14,1081.86 ccw(c1775.92,1096.64) U1.57@1775.92,1075.74 ; U1.57@1765.14,1077.86 cw(c1756.02,1068.74) U1.57@1768.92,1068.74 ; U1.57@1775.92,995 cw(c1775.92,820.97) U1.57@1898.97,944.03 ; U1.57@1775.92,1005 cw(c1775.92,855.11) U1.57@1881.9,961.1 ; U1.57@1775.92,1015 cw(c1775.92,889.26) U1.57@1864.83,978.17 ; U1.57@1775.92,1025 cw(c1775.92,923.4) U1.57@1847.76,995.24 ; U1.57@1775.92,1061.74 cw(c1775.92,1048.84) U1.57@1785.04,1057.96 ; U1.57@1779.53,1067.77 cw(c1844.07,1050.37) U1.57@1844.07,1117.21 ; U1.57@1782.92,1068.74 ccw(c1803.81,1068.74) U1.57@1789.04,1053.96 ; U1.57@1789.18,1065.16 cw(c1857.12,1046.86) U1.57@1857.12,1117.21 ; U1.57@1794.46,1048.54 ccw(c1813.22,1067.31) U1.57@1813.22,1040.77 ; U1.57@1797.64,1078.31 ccw(c1858.74,1105.25) U1.57@1858.74,1038.47 ; U1.57@1798.84,1062.56 cw(c1870.17,1043.34) U1.57@1870.17,1117.21 ; U1.57@1804.53,1038.47 U1.34@1935.43,1038.47 ; U1.57@1806.79,1082.35 ccw(c1874.08,1112.01) U1.57@1874.08,1038.47 ; U1.57@1808.49,1059.96 cw(c1883.22,1039.82) U1.57@1883.22,1117.21 ; U1.57@1809.66,1068.58 ccw(c1893.76,1068.18) U1.57@1834.29,1008.71 ; U1.57@1812.38,985.51 cw(c1832.02,937.07) U1.57@1868.97,974.03 ; U1.57@1815.94,1086.38 ccw(c1889.42,1118.77) U1.57@1889.42,1038.47 ; U1.57@1816.14,976.24 cw(c1838.17,921.89) U1.57@1879.64,963.36 ; U1.57@1818.17,1028.82 cw(c1841.47,1005.52) U1.57@1841.47,1038.47 ; U1.57@1818.15,1057.36 cw(c1896.27,1036.3) U1.57@1896.27,1117.21 ; U1.57@1819.66,1068.53 ccw(c1927.51,1068.02) U1.57@1851.25,991.75 ; U1.57@1819.9,966.97 cw(c1844.33,906.71) U1.57@1890.31,952.69 ; U1.57@1820.22,1033.77 ccw(c1846.76,1033.77) U1.57@1828,1015 ; U1.57@1820.99,1023.67 cw(c1856.73,987.93) U1.57@1856.73,1038.47 ; U1.57@1822.28,1038.47 cw(c1822.28,1005.52) U1.57@1845.58,1028.82 ; U1.57@1823.65,957.7 cw(c1850.48,891.53) 1900.98,942.02 cw(c1949.17,990.21) U1.57@1887.18,1018.53 ; U1.57@1825.09,1090.42 ccw(c1904.75,1125.53) 1904.75,1038.47 ; U1.57@1827.77,1015.23 ccw(c1850.53,1037.99) U1.57@1850.53,1005.8 ; U1.57@1827.81,1054.75 cw(c1909.32,1032.79) 1909.32,1117.21 ; U1.57@1828.06,1016.6 cw(c1880.87,963.78) U1.57@1880.87,1038.47 ; U1.57@1829.66,1068.48 ccw(c1961.26,1067.86) U1.57@1868.2,974.8 ; U1.57@1834.24,1094.45 ccw(c1920.09,1132.29) 1920.09,1038.47 ; U1.57@1837.05,1117.21 cw(c1837.05,1100.31) U1.57@1853.44,1104.44 ; U1.57@1837.46,1052.15 cw(c1922.38,1029.27) U1.38@1922.38,1117.21 ; U1.57@1839.66,1068.44 ccw(c1995.02,1067.7) U1.57@1885.16,957.84 ; U1.57@1839.74,1117.21 cw(c1839.74,1056.19) U1.57@1882.88,1099.34 ; U1.57@1841.34,1112.9 cw(c1851.75,1102.49) U1.57@1851.75,1117.21 ; U1.57@1843.39,1098.48 ccw(c1935.43,1139.05) U1.34@1935.43,1038.47 ; U1.57@1843.74,1102 ccw(c1824.21,1097.07) 1824.21,1117.21 U1.38@1935.43,1117.21 ; U1.25@1843.9,907.57 1843.9,999.1 U1.32@1935.43,999.1 ; 1843.9,931.51 cw(c1883.44,931.51) U1.57@1855.48,959.47 ; 1843.9,937.5 cw(c1909.44,937.5) 1863.09,983.84 cw(c1899.93,947) U1.57@1899.93,999.1 ; U1.57@1843.9,961.64 cw(c1885.3,961.64) U1.57@1856.02,990.91 ; U1.57@1843.9,965.89 cw(c1883.44,965.89) 1855.48,993.85 cw(c1868.15,981.18) U1.57@1868.15,999.1 ; U1.57@1843.9,997.33 ccw(c1883.44,997.33) U1.57@1855.48,969.37 ; U1.57@1847.12,1049.55 cw(c1935.43,1025.75) U1.38@1935.43,1117.21 ; U1.57@1848.41,1105.83 cw(c1875.89,1078.34) U1.57@1875.89,1117.21 ; U1.57@1849.66,1068.39 ccw(c2028.77,1067.54) 1902.12,940.88 ; U1.57@1855.48,1003.75 ccw(c1866.7,1014.98) U1.57@1866.7,999.1 ; U1.57@1855.48,1028.82 cw(c1878.78,1005.52) U1.57@1878.78,1038.47 ; U1.57@1855.48,1098.76 cw(c1900.03,1054.2) U1.57@1900.03,1117.21 ; U1.57@1857.53,998.8 ccw(c1889.71,998.8) U1.57@1866.96,976.04 ; U1.57@1859.9,1031 ccw(c1907.24,1009.37) U1.57@1870.43,972.57 ; U1.57@1860.05,1140.83 ccw(c1913.01,1188.38) 1913.01,1117.21 ; U1.57@1860.09,982.91 ccw(c1887.83,1010.65) U1.57@1887.83,971.42 ; U1.57@1860.99,1038.47 cw(c1860.99,1007.51) U1.57@1882.88,1029.4 ; U1.57@1863.88,1117.21 cw(c1863.88,1080.33) U1.57@1889.96,1106.41 ; U1.57@1864.27,1017.78 cw(c1900.45,996.5) U1.57@1900.45,1038.47 ; U1.57@1867.49,1147.52 ccw(c1935.43,1208.51) U1.38@1935.43,1117.21 ; U1.57@1867.83,1072.64 ccw(c1903.82,1074.51) 1903.82,1038.47 ; U1.57@1868.99,1026.84 ccw(c1921.21,1002.98) U1.57@1880.62,962.38 ; U1.57@1870.25,999.1 ccw(c1870.25,1016.97) U1.57@1882.88,1004.34 ; U1.57@1871.62,999.1 cw(c1871.62,983.17) U1.57@1882.88,994.44 ; U1.57@1872.89,1012.71 cw(c1917.94,986.21) 1917.94,1038.47 ; U1.57@1877.82,1073.16 ccw(c1914.36,1075.06) 1914.36,1038.47 ; U1.57@1878.09,1022.69 ccw(c1935.19,996.59) U1.57@1890.8,952.2 ; U1.57@1878.57,1113.41 cw(c1887.65,1104.47) U1.57@1887.65,1117.21 ; U1.57@1881.51,1007.64 cw(c1935.43,975.92) U1.34@1935.43,1038.47 ; U1.57@1883.27,1176.27 U1.44@1883.27,1228.43 ; 1883.27,1202.15 ccw(c1915.76,1202.15) U1.57@1892.78,1179.18 ; U1.57@1885.7,1106.39 cw(c1911.54,1080.93) 1911.54,1117.21 ; U1.57@1887.8,1073.68 ccw(c1924.89,1075.61) U1.34@1924.89,1038.47 ; U1.57@1888.02,1117.21 cw(c1888.02,1104.47) U1.57@1897.03,1113.48 ; U1.57@1892.78,994.44 cw(c1904.05,983.17) 1904.05,999.1 ; U1.57@1892.78,1004.34 ccw(c1905.42,1016.97) 1905.42,999.1 ; U1.57@1892.78,1029.4 cw(c1914.68,1007.51) 1914.68,1038.47 ; U1.57@1892.82,1099.38 cw(c1935.43,1057.4) U1.38@1935.43,1117.21 ; U1.57@1894.42,962.06 ccw(c1910.1,956.45) U1.57@1898.33,944.67 ; U1.57@1897.79,1074.2 ccw(c1935.43,1076.16) U1.34@1935.43,1038.47
  Top Layer w15: C8.1@370.59,527.88 cw(c357.34,514.63) 376.08,514.63 ; C16.1@370.59,721.2 ccw(c357.34,734.45) 376.08,734.45 ; C44.1@371.46,1177.88 cw(c358.21,1164.63) 376.95,1164.63 ; C52.1@371.46,1371.2 ccw(c358.21,1384.45) 376.95,1384.45 ; C8.1@375.08,534.08 376.08,533.08 v1(376.08,500) ; C16.1@375.08,715.92 376.08,716.92 v1(376.08,750) ; C44.1@375.95,1184.08 376.95,1183.08 v1(376.95,1150) ; C52.1@375.95,1366.84 376.95,1367.84 v1(376.95,1400.92) ; 376.08,515.66 cw(c393.36,515.66) C8.1@381.14,527.88 ; 376.08,733.42 ccw(c393.36,733.42) C16.1@381.14,721.2 ; 376.95,1165.66 cw(c394.24,1165.66) C44.1@382.01,1177.88 ; 376.95,1383.42 ccw(c394.24,1383.42) C52.1@382.01,1371.2 ; C15.1@560.8,527.88 cw(c548.07,515.15) 566.08,515.15 cw(c584.09,515.15) C15.1@571.35,527.88 ; C7.1@560.8,721.2 ccw(c548.07,733.93) 566.08,733.93 ccw(c584.09,733.93) C7.1@571.35,721.2 ; C51.1@561.67,1177.88 cw(c548.94,1165.15) 566.95,1165.15 cw(c584.96,1165.15) C51.1@572.22,1177.88 ; C43.1@561.67,1371.2 ccw(c548.94,1383.93) 566.95,1383.93 ccw(c584.96,1383.93) C43.1@572.22,1371.2 ; C15.1@565.08,534.08 566.08,533.08 v1(566.08,500) ; C7.1@565.08,715.92 566.08,716.92 v1(566.08,750) ; C51.1@565.95,1184.08 566.95,1183.08 v1(566.95,1150) ; C43.1@565.95,1366.84 566.95,1367.84 v1(566.95,1400.92) ; C14.1@749.8,527.88 cw(c737.07,515.15) 755.08,515.15 cw(c773.09,515.15) C14.1@760.35,527.88 ; C6.1@749.8,721.2 ccw(c737.07,733.93) 755.08,733.93 ccw(c773.09,733.93) C6.1@760.35,721.2 ; C50.1@750.67,1177.88 cw(c737.94,1165.15) 755.95,1165.15 cw(c773.96,1165.15) C50.1@761.22,1177.88 ; C42.1@750.67,1371.2 ccw(c737.94,1383.93) 755.95,1383.93 ccw(c773.96,1383.93) C42.1@761.22,1371.2 ; C14.1@754.08,534.08 755.08,533.08 v1(755.08,500) ; C6.1@754.08,715.92 755.08,716.92 v1(755.08,750) ; C50.1@754.95,1184.08 755.95,1183.08 v1(755.95,1150) ; C42.1@754.95,1366.84 755.95,1367.84 v1(755.95,1400.92) ; C5.1@940.59,528.8 cw(c927.34,515.55) 946.08,515.55 ; C13.2@940.59,721.2 ccw(c927.34,734.45) 946.08,734.45 ; C41.1@941.46,1178.8 cw(c928.21,1165.55) 946.95,1165.55 ; C49.2@941.46,1372.12 ccw(c928.21,1385.37) 946.95,1385.37 ; C5.1@945.08,534.08 946.08,533.08 v1(946.08,500) ; C13.2@945.08,715.92 946.08,716.92 v1(946.08,750) ; C41.1@945.95,1184.08 946.95,1183.08 v1(946.95,1150) ; C49.2@945.95,1366.84 946.95,1367.84 v1(946.95,1400.92) ; 946.08,516.58 cw(c963.36,516.58) C5.1@951.14,528.8 ; 946.08,733.42 ccw(c963.36,733.42) C13.2@951.14,721.2 ; 946.95,1166.58 cw(c964.24,1166.58) C41.1@952.01,1178.8 ; 946.95,1384.34 ccw(c964.24,1384.34) C49.2@952.01,1372.12 ; C74.2@1051.72,965.76 ccw(c1038.99,978.5) 1057,978.5 ccw(c1075.01,978.5) C74.2@1062.28,965.76 ; v1(1057,998) C74.2@1057,960.49 v1(1086,960.49) ; C74.2@1063.06,955.21 cw(c1075.8,942.48) 1075.8,960.49 cw(c1075.8,978.5) C74.2@1063.06,965.76 ; v1(1088.08,725) T2.4@1145.08,725 v1(1145.08,761) ; v1(1088.95,1370) T5.4@1145.95,1370 v1(1145.95,1406) ; v1(1111,899) 1125.65,899 1130.65,894 C76.2@1168.16,894 1168.16,856.49 ; v1@1112.99,894.97 cw(c1120.69,879.4) 1132.97,891.68 ; T2.4@1122.28,719.72 ccw(c1109.55,706.99) 1109.55,725 ccw(c1109.55,743.01) T2.4@1122.28,730.28 ; T5.4@1123.15,1364.72 ccw(c1110.42,1351.99) 1110.42,1370 ccw(c1110.42,1388.01) T5.4@1123.15,1375.28 ; T2.4@1139.8,730.28 ccw(c1127.07,743.01) 1145.08,743.01 ccw(c1163.09,743.01) T2.4@1150.35,730.28 ; T5.4@1140.67,1375.28 ccw(c1127.94,1388.01) 1145.95,1388.01 ccw(c1163.96,1388.01) T5.4@1151.22,1375.28 ; C76.2@1162.88,887.94 cw(c1150.15,875.2) 1168.16,875.2 cw(c1186.17,875.2) C76.2@1173.43,887.94 ; C76.2@1162.88,888.72 ccw(c1150.15,875.99) 1150.15,894 ccw(c1150.15,912.01) C76.2@1162.88,899.28 ; 1168.16,859.31 ccw(c1185.31,859.31) v1@1173.18,847.18 ; v1(1170,844) 1170,854.65 1168.16,856.49 ; v1@1172.65,847.63 cw(c1179.12,856.49) 1168.16,856.49 ; C70.2@1449.88,1087.57 ccw(c1437.15,1100.31) 1455.16,1100.31 ccw(c1473.17,1100.31) C70.2@1460.43,1087.57 ; C78.2@1449.88,1140.94 cw(c1437.15,1128.2) 1455.16,1128.2 cw(c1473.17,1128.2) C78.2@1460.43,1140.94 ; C78.2@1449.88,1153.06 ccw(c1437.15,1165.8) 1455.16,1165.8 ccw(c1473.17,1165.8) C78.2@1460.43,1153.06 ; C70.2@1455.16,1081.51 1455.16,1112 C78.2@1455.16,1147 v1@1455.16,1177 ; C69.2@1540.72,769.8 cw(c1527.99,757.07) 1546,757.07 cw(c1564.01,757.07) C69.2@1551.28,769.8 ; v1(1546,736.31) C69.2@1546,775.08 ; R1.1@1606.72,769.8 cw(c1593.99,757.07) 1612,757.07 cw(c1630.01,757.07) R1.1@1617.28,769.8 ; v1(1612,736.31) R1.1@1612,775.08 ; C59.2@1640.72,1399.12 ccw(c1627.99,1411.85) 1646,1411.85 ccw(c1664.01,1411.85) C59.2@1651.28,1399.12 ; C59.2@1646,1393.84 v1(1646,1428) ; C67.2@1669.72,769.8 cw(c1656.99,757.07) 1675,757.07 cw(c1693.01,757.07) C67.2@1680.28,769.8 ; v1(1675,736.31) C67.2@1675,775.08 ; R9.1@1730.88,584.86 cw(c1718.15,572.12) 1736.16,572.12 cw(c1754.17,572.12) R9.1@1741.43,584.86 ; R9.1@1730.88,596.98 ccw(c1718.15,609.72) 1736.16,609.72 ccw(c1754.17,609.72) R9.1@1741.43,596.98 ; C66.2@1732.72,769.8 cw(c1719.99,757.07) 1738,757.07 cw(c1756.01,757.07) C66.2@1743.28,769.8 ; v1(1736.16,552.16) R9.1@1736.16,590.92 v1(1736.16,629.68) ; v1(1738,736.31) C66.2@1738,775.08 ; C64.2@1768.72,1399.12 ccw(c1755.99,1411.85) 1774,1411.85 ccw(c1792.01,1411.85) C64.2@1779.28,1399.12 ; C64.2@1774,1393.84 v1(1774,1428) ; U1.57@1801.25,1094.25 cw(c1813.22,1082.27) U1.57@1813.22,1099.21 ; U1.57@1804.53,1038.47 U1.57@1775,1068 ; U1.57@1817.72,1033.77 ccw(c1838.23,1033.77) U1.57@1823.73,1019.27 ; U1.57@1817.72,1103.71 cw(c1834.66,1103.71) U1.57@1822.68,1115.68 ; U1.57@1824.21,1117.21 U1.57@1775,1068 ; U1.57@1832.04,1010.96 ccw(c1850.53,1029.45) U1.57@1850.53,1003.3 ; U1.57@1843.9,999.1 U1.57@1775,1068 ; C73.2@1857.72,1399.12 ccw(c1844.99,1411.85) 1863,1411.85 ccw(c1881.01,1411.85) C73.2@1868.28,1399.12 ; C73.2@1863,1393.84 v1(1863,1428) ; T1.5@1870.72,250.2 cw(c1857.99,237.47) 1876,237.47 cw(c1894.01,237.47) T1.5@1881.28,250.2 ; T1.5@1870.72,295.8 ccw(c1857.99,308.53) 1876,308.53 ccw(c1894.01,308.53) T1.5@1881.28,295.8 ; v1(1876,221) T1.5@1876,273 v1(1876,325) ; C72.2@1904,775.08 v1(1942.76,775.08) ; C72.2@1910.06,769.8 cw(c1922.8,757.07) 1922.8,775.08 cw(c1922.8,793.09) C72.2@1910.06,780.35 ; R5.2@1910.57,584.86 cw(c1897.45,571.74) 1916,571.74 ; R5.2@1910.57,596.98 ccw(c1897.83,609.72) 1915.84,609.72 ccw(c1933.85,609.72) R5.2@1921.12,596.98 ; R5.2@1915.84,590.92 v1(1915.84,629.68) ; v1(1916,552) R5.2@1916,590.76 ; 1916,572.5 cw(c1933.47,572.5) R5.2@1921.12,584.86 ; v1(1960.92,1633.92) 1961.92,1632.92 2000.08,1632.92 2000.08,1671.08 v1(2001.08,1672.08) ; v1@1964.1,1637.1 ccw(c1974.2,1647.2) 1974.2,1632.92 ; v1@1976,217.22 cw(c2015.3,217.22) Y1.2@2004.18,254.91 ; v1@1976,219.96 1976,256.48 Y1.2@2005,285.48 ; 1976,237.29 cw(c2009.38,237.29) Y1.2@1999.93,269.3 ; 1976,331.74 ccw(c2006.84,331.74) Y1.2@1999.29,301.84 ; 1978.79,1632.92 cw(c1978.79,1611.5) C57.2@1993.94,1626.65 ; 1983.62,1632.92 ccw(c1983.62,1647.52) C57.2@1993.94,1637.2 ; R4.1@1985.72,525.8 cw(c1972.99,513.07) 1991,513.07 cw(c2009.01,513.07) R4.1@1996.28,525.8 ; v1(1991,492.31) R4.1@1991,531.08 ; C57.2@1994.72,1637.2 ccw(c1981.8,1650.12) 2000.08,1650.12 ; 2000.08,1649.74 ccw(c2017.82,1649.74) C57.2@2005.28,1637.2 ; 2000.08,1658.8 cw(c2014.36,1658.8) v1@2004.26,1668.9 ; Y1.2@2002.96,316.38 cw(c2011.7,351) 1976,351 1976,314.48 Y1.2@2005,285.48 ; Y1.2@2005.82,254.91 cw(c1994.7,217.22) v1@2034,217.22 ; Y1.2@2007.04,316.38 ccw(c1998.3,351) 2034,351 2034,314.48 Y1.2@2005,285.48 ; Y1.2@2010.07,269.3 cw(c2000.62,237.29) 2034,237.29 ; Y1.2@2010.71,301.84 ccw(c2003.16,331.74) 2034,331.74 ; v1@2034,219.96 2034,256.48 Y1.2@2005,285.48 ; C1.2@2053.28,721.12 ccw(c2040.55,733.85) 2058.56,733.85 ccw(c2076.57,733.85) C1.2@2063.83,721.12 ; C1.2@2058.56,715.84 v1(2058.56,754.61) ; C75.2@2108.57,1083.06 ccw(c2095.83,1095.8) 2113.84,1095.8 ccw(c2131.85,1095.8) C75.2@2119.12,1083.06 ; C60.2@2108.57,1137.94 cw(c2095.83,1125.2) 2113.84,1125.2 cw(c2131.85,1125.2) C60.2@2119.12,1137.94 ; C60.2@2108.57,1150.06 ccw(c2095.83,1162.8) 2113.84,1162.8 ccw(c2131.85,1162.8) C60.2@2119.12,1150.06 ; C62.2@2113.84,926 2152,926 2153,925 ; C63.2@2113.84,991 2152,991 v1(2153,990) ; C75.2@2113.84,1077 v1(2113.84,1110) C60.2@2113.84,1144 v1(2113.84,1175.16) ; C62.2@2119.12,920.72 cw(c2131.85,907.99) 2131.85,926 cw(c2131.85,944.01) C62.2@2119.12,931.28 ; C63.2@2119.12,985.72 cw(c2131.85,972.99) 2131.85,991 cw(c2131.85,1009.01) C63.2@2119.12,996.28 ; 2139.72,991 cw(c2139.72,976.72) v1@2149.82,986.82 ; C58.2@2141.72,1637.2 ccw(c2128.8,1650.12) 2147.08,1650.12 ; C58.2@2147.08,1632.92 2147.08,1671.08 v1(2148.08,1672.08) ; 2147.08,1649.74 ccw(c2164.82,1649.74) C58.2@2152.28,1637.2 ; 2147.08,1658.8 cw(c2161.36,1658.8) v1@2151.26,1668.9 ; C2.1@2305.72,193.12 ccw(c2292.99,205.85) 2311,205.85 ccw(c2329.01,205.85) C2.1@2316.28,193.12 ; v1(2311,229.84) C2.1@2311,187.84 v1(2353,187.84) ; C2.1@2317.06,182.57 cw(c2329.8,169.83) 2329.8,187.84 cw(c2329.8,205.85) C2.1@2317.06,193.12 ; C77.2@2333.84,926 2372,926 2373,925 ; C61.2@2333.84,1143 2372,1143 v1(2373,1142) ; C77.2@2339.12,920.72 cw(c2351.85,907.99) 2351.85,926 cw(c2351.85,944.01) C77.2@2339.12,931.28 ; C61.2@2339.12,1137.72 cw(c2351.85,1124.99) 2351.85,1143 cw(c2351.85,1161.01) C61.2@2339.12,1148.28 ; 2359.72,1143 cw(c2359.72,1128.72) v1@2369.82,1138.82 ; U2.1@2370.6,2114.91 cw(c2343.08,2087.39) 2382,2087.39 cw(c2420.92,2087.39) U2.1@2393.4,2114.91 ; v1(2382,2079) U2.1@2382,2146 v1(2438,2146) ; U2.1@2393.4,2134.6 cw(c2420.92,2107.08) 2420.92,2146 cw(c2420.92,2184.92) U2.1@2393.4,2157.4 ; T3.6@2396.72,730.28 ccw(c2383.99,743.01) 2402,743.01 ccw(c2420.01,743.01) T3.6@2407.28,730.28 ; T4.6@2396.72,1375.28 ccw(c2383.99,1388.01) 2402,1388.01 ccw(c2420.01,1388.01) T4.6@2407.28,1375.28 ; v1(2402,761) T3.6@2402,725 v1(2459,725) ; v1(2402,1406) T4.6@2402,1370 v1(2459,1370) ; T3.6@2424.8,719.72 cw(c2437.53,706.99) 2437.53,725 cw(c2437.53,743.01) T3.6@2424.8,730.28 ; T4.6@2424.8,1364.72 cw(c2437.53,1351.99) 2437.53,1370 cw(c2437.53,1388.01) T4.6@2424.8,1375.28 ; v1(2433.88,2010.12) C54.2@2500,2010.12 v1(2500,2075) ; C54.2@2479.1,1993.15 ccw(c2438.13,1952.19) 2438.13,2010.12 ccw(c2438.13,2068.05) C54.2@2479.1,2027.09 ; C54.2@2483.03,2027.09 ccw(c2442.07,2068.05) 2500,2068.05 ccw(c2557.93,2068.05) C54.2@2516.97,2027.09 ; C25.2@2597.51,528.8 cw(c2584.26,515.55) 2603,515.55 ; C17.1@2597.51,721.2 ccw(c2584.26,734.45) 2603,734.45 ; C37.2@2598.02,1172.88 cw(c2584.77,1159.63) 2603.51,1159.63 ; C29.1@2598.02,1366.2 ccw(c2584.77,1379.45) 2603.51,1379.45 ; C25.2@2602,534.08 2603,533.08 v1(2603,500) ; C17.1@2602,715.92 2603,716.92 v1(2603,750) ; C37.2@2602.51,1179.08 2603.51,1178.08 v1(2603.51,1145) ; C29.1@2602.51,1361.84 2603.51,1362.84 v1(2603.51,1395.92) ; 2603,516.58 cw(c2620.29,516.58) C25.2@2608.06,528.8 ; 2603,733.42 ccw(c2620.29,733.42) C17.1@2608.06,721.2 ; 2603.51,1160.66 cw(c2620.8,1160.66) C37.2@2608.57,1172.88 ; 2603.51,1378.42 ccw(c2620.8,1378.42) C29.1@2608.57,1366.2 ; C18.1@2787.51,528.8 cw(c2774.26,515.55) 2793,515.55 ; C26.1@2787.51,721.2 ccw(c2774.26,734.45) 2793,734.45 ; C30.1@2788.02,1173.8 cw(c2774.77,1160.55) 2793.51,1160.55 ; C38.1@2788.02,1367.12 ccw(c2774.77,1380.37) 2793.51,1380.37 ; C18.1@2792,534.08 2793,533.08 v1(2793,500) ; C26.1@2792,715.92 2793,716.92 v1(2793,750) ; U3.1@2792,2146 v1(2869,2146) ; C30.1@2792.51,1179.08 2793.51,1178.08 v1(2793.51,1145) ; C38.1@2792.51,1361.84 2793.51,1362.84 v1(2793.51,1395.92) ; 2793,516.58 cw(c2810.29,516.58) C18.1@2798.06,528.8 ; 2793,733.42 ccw(c2810.29,733.42) C26.1@2798.06,721.2 ; 2793.51,1161.58 cw(c2810.8,1161.58) C30.1@2798.57,1173.8 ; 2793.51,1379.34 ccw(c2810.8,1379.34) C38.1@2798.57,1367.12 ; U3.1@2803.4,2134.6 cw(c2830.92,2107.08) 2830.92,2146 cw(c2830.92,2184.92) U3.1@2803.4,2157.4 ; 2862.32,2057.8 cw(c2814.63,2010.12) C56.2@2882.07,2010.12 ; v1(2864,2079) 2864,2056.12 C56.2@2910,2010.12 ; 2871.82,2048.3 ccw(c2906.06,2082.54) C56.2@2906.06,2034.11 ; C56.2@2893.03,2027.09 ccw(c2852.07,2068.05) 2910,2068.05 ccw(c2967.93,2068.05) C56.2@2926.97,2027.09 ; v1(2910,2079) C56.2@2910,2010.12 ; C56.2@2913.94,2034.11 ccw(c2913.94,2082.54) 2948.18,2048.3 ; C56.2@2937.93,2010.12 cw(c3005.37,2010.12) 2957.68,2057.8 ; v1(2959,2080) 2959,2059.12 C56.2@2910,2010.12 ; C19.1@2976.51,528.8 cw(c2963.26,515.55) 2982,515.55 ; C27.1@2976.51,721.2 ccw(c2963.26,734.45) 2982,734.45 ; C31.1@2977.02,1173.8 cw(c2963.77,1160.55) 2982.51,1160.55 ; C39.1@2977.02,1367.12 ccw(c2963.77,1380.37) 2982.51,1380.37 ; C19.1@2981,534.08 2982,533.08 v1(2982,500) ; C27.1@2981,715.92 2982,716.92 v1(2982,750) ; C31.1@2981.51,1179.08 2982.51,1178.08 v1(2982.51,1145) ; C39.1@2981.51,1361.84 2982.51,1362.84 v1(2982.51,1395.92) ; 2982,516.58 cw(c2999.29,516.58) C19.1@2987.06,528.8 ; 2982,733.42 ccw(c2999.29,733.42) C27.1@2987.06,721.2 ; 2982.51,1161.58 cw(c2999.8,1161.58) C31.1@2987.57,1173.8 ; 2982.51,1379.34 ccw(c2999.8,1379.34) C39.1@2987.57,1367.12 ; v1(2989,2006) C55.2@3051.88,2006 v1(3051.88,2068.88) ; C55.2@3034.91,1989.03 ccw(c2993.95,1948.07) 2993.95,2006 ccw(c2993.95,2063.93) C55.2@3034.91,2022.97 ; C55.2@3034.91,2026.9 ccw(c2993.95,2067.87) 3051.88,2067.87 ccw(c3109.81,2067.87) C55.2@3068.85,2026.9 ; 3062.03,1894 ccw(c3062.03,1918.93) C53.2@3083.6,1906.43 ; 3062.03,1928 cw(c3062.03,1903.07) C53.2@3083.6,1915.57 ; C53.2@3063,1896.92 cw(c3077.08,1882.84) C53.2@3077.08,1902.75 ; C53.2@3063,1925.08 ccw(c3077.08,1939.16) C53.2@3077.08,1919.25 ; C53.2@3064.9,1898.82 ccw(c3053.51,1910.21) C53.2@3069.62,1910.21 ; C53.2@3064.9,1923.18 cw(c3053.51,1911.79) C53.2@3069.62,1911.79 ; C53.2@3070.62,1908.05 ccw(c3036,1887.99) v1(3036,1928) 3060.08,1928 C53.2@3077.08,1911 3060.08,1894 v1(3036,1894) ccw(c3036,1934.01) C53.2@3070.62,1913.95 ; C28.1@3167.51,528.8 cw(c3154.26,515.55) 3173,515.55 ; C20.1@3167.51,721.2 ccw(c3154.26,734.45) 3173,734.45 ; C40.1@3168.02,1173.8 cw(c3154.77,1160.55) 3173.51,1160.55 ; C32.1@3168.02,1367.12 ccw(c3154.77,1380.37) 3173.51,1380.37 ; C28.1@3172,534.08 3173,533.08 v1(3173,500) ; C20.1@3172,715.92 3173,716.92 v1(3173,750) ; C40.1@3172.51,1179.08 3173.51,1178.08 v1(3173.51,1145) ; C32.1@3172.51,1361.84 3173.51,1362.84 v1(3173.51,1395.92) ; 3173,516.58 cw(c3190.29,516.58) C28.1@3178.06,528.8 ; 3173,733.42 ccw(c3190.29,733.42) C20.1@3178.06,721.2 ; 3173.51,1161.58 cw(c3190.8,1161.58) C40.1@3178.57,1173.8 ; 3173.51,1379.34 ccw(c3190.8,1379.34) C32.1@3178.57,1367.12 ; D1.2@3367.87,2033.59 ccw(c3347.07,2054.39) 3376.49,2054.39 ccw(c3405.91,2054.39) D1.2@3385.1,2033.59 ; D1.2@3376.49,2024.98 v1(3376.49,2066.49) ; U1.57@1780.42,1068.74 ccw(c1795.28,1068.74) 1784.77,1058.23 cw(c1795.28,1068.74) U1.57@1780.42,1068.74 ; U1.57@1798.72,1044.28 ccw(c1813.22,1058.78) 1813.22,1038.27 cw(c1813.22,1058.78) U1.57@1798.72,1044.28
  Top Layer w30: 124,287 pad.0@124,129 279,129 ; 124,2037 pad.0@124,2229 299,2229 ; U3.1@2792,2146 2792,2075 2856.88,2010.12 C56.2@2910,2010.12 ; C56.2@2894.4,1998.45 ccw(c2866.24,1970.29) 2866.24,2010.12 ccw(c2866.24,2049.94) C56.2@2894.4,2021.78 ; 3235,129 pad.0@3427,129 3427,278 ; 3308,2229 pad.0@3427,2229 3427,2086
  Bottom Layer w30: v1(107,2088) 124,2105 pad.0@124,2229 281,2229 ; 124,286 pad.0@124,129 284,129 ; 3239,129 pad.0@3427,129 3427,246 ; 3291,2229 pad.0@3427,2229 pad.0@3427,2221
  other v1: 1428,42 1531,44 1665.15,44 1799.31,44 1933.46,44 2067.62,44 2201.77,44 2335.92,44 2470.08,44.87 2604.23,44.87 2738.38,44.87 2872.54,44.87 3006.69,44.87 3140.85,44.87 3275,44.87 1215,47 229,48.87 359,48.87 489,48.87 619,48.87 749,48.87 879,48.87 1009,48.87 333,113 523,113 712,113 903,113 2456,115 2547,134 2737,134 2926,134 3117,134 459,173 649,173 838,173 1029,173 1840,181 2518,195 2658,213 2848,213 3037,213 3228,213 337,217 527,217 716,217 907,217 1976,216.96 2034,216.96 1586,231 1428,244 231,258 421,258 610,258 801,258 1940,274 1695,279 2702,285 2891,285 3082,285 2605,287 45.13,303 956,305 868,309 1485,311 2360,319 136,329 326,329 515,329 706,329 3501.56,329 1033,345 1223,345 1412,345 1603,345 2781,349 2971,349 3160,349 3351,349 1976,354 2034,354 2686,355 2066,397 2256,397 2445,397 889,405 1079,405 1268,405 1459,405 215,408 405,408 594,408 785,408 1700,410 2352,414 1011,431 45.13,433 3211,435 3401,435 1178,439 2508,441 2887,441 3078,441 1648,442 1940,445 2228,453 310,459 3501.56,459 1504,474 1368,476 2149,489 2339,489 2528,489 2719,489 668,494 480,495 865,503 2432,505 1074,511 1230,519 272,520 45.13,525 106.63,525 168.13,525 3378.05,525 3439.55,525 3501.56,525 1438,543 1512,568 1672,573 1584,616 1676,663 1504,681 1020,717 315,724 505,724 45.13,725 106.63,725 168.13,725 241,725 431,725 811,725 3378.05,725 3439.55,725 3501.56,725 1948,729 3295,731 1509,736.31 2025,771 2328,774 1278,775 2244,775 1509,777.08 267,780 457,780 646,780 837,780 1034,783 2545,787 1222,795 2750,799 45.13,803 2278,803 1105,811 2144,814 135,819 325,819 514,819 705,819 2244,823 2318,823 2865,824 3054,824 3245,824 235,827 425,827 614,827 805,827 3501.56,829 912,831 2598,861 2788,861 2977,861 3168,861 3344,865 175,866 365,866 554,866 745,866 67,896 257,896 446,896 637,896 2847,926 3037,926 3226,926 3417,926 119,932 309,932 498,932 689,932 852,945 45.13,953 1664,964.42 1701.31,964.42 1738.61,964.42 1775.92,964.42 1813.22,964.42 1850.53,964.42 1887.83,964.42 1431.16,967 1459.16,967 183,971 373,971 562,971 753,971 1368,979 3501.56,979 1308,997 1664,998.8 1701.31,998.8 1738.61,998.8 1775.92,998.8 1813.22,998.8 1850.53,998.8 1887.83,999.39 99,1007 289,1007 478,1007 669,1007 2715,1016 2905,1016 3094,1016 3285,1016 1664,1033.77 1701.31,1033.77 1738.61,1033.77 1775.92,1033.77 1813.22,1033.77 1850.53,1033.77 1887.83,1034.35 2466,1035 2503.51,1035 874,1039 149,1041 339,1041 528,1041 719,1041 1328,1046 1664,1068.74 1701.31,1068.74 1738.61,1068.74 1775.92,1068.74 1813.22,1068.74 1850.53,1068.74 1887.83,1069.32 2786,1069 2976,1069 3165,1069 3356,1069 191,1077 381,1077 570,1077 761,1077 45.13,1083 2620,1085 275,1091 465,1091 654,1091 845,1091 924,1099 1664,1103.71 1701.31,1103.71 1738.61,1103.71 1775.92,1103.71 1813.22,1103.71 1850.53,1103.71 1887.83,1104.29 3501.56,1109 1455,1114 3260,1133 1022,1135 1664,1138.67 1701.31,1138.67 1738.61,1138.67 1775.92,1138.67 1813.22,1138.67 1850.53,1138.67 1887.83,1139.26 848,1163 3378.56,1170 3440.06,1170 3501.56,1170 1664,1173.64 1701.31,1173.64 1738.61,1173.64 1775.92,1173.64 1813.22,1173.64 1850.53,1173.64 1887.83,1174.23 46,1175 107.5,1175 169,1175 1455,1177 1495,1187 1128.16,1200 1648,1205 1616,1237 1462,1292 1592,1293 1462,1346 2056,1352 1588,1353 3378.56,1370 3440.06,1370 3501.56,1370 884,1371 46,1375 107.5,1375 169,1375 2026,1379 251,1382 441,1382 630,1382 821,1382 1455,1395 2096,1409 1592,1417 1432,1422 2252,1425 2460,1433 2735,1436 2925,1436 3114,1436 3305,1436 847,1443 2341,1443 1168,1445 1395,1451 139,1459 329,1459 518,1459 709,1459 2605,1459 2168,1465 46,1467 1765,1467 1861,1467 1587,1479 975,1483 3248,1486 3501.56,1493 2248,1502 205,1505 395,1505 584,1505 775,1505 2343,1519 2442,1519 320,1529 510,1529 699,1529 890,1529 2748,1549 2808,1557 2998,1557 3187,1557 3378,1557 1198,1575 1255,1579 46,1597 141,1601 331,1601 520,1601 711,1601 2305,1611 1904,1613 1244,1617 2340,1617 2520,1617 1202,1623 3501.56,1623 2867,1626 3057,1626 3246,1626 3437,1626 2705,1631 906,1643 1480,1649 1180,1652 1408,1653 1214,1655 234,1661 424,1661 613,1661 804,1661 2337,1663 2478,1667 2658,1687 1892,1692 1812,1696 2336,1708 132,1721 322,1721 511,1721 702,1721 1190,1723 1402,1723 2468,1726 1598,1731 3060,1733 3250,1733 3439,1733 2605,1735 1980,1741 46,1747 1197,1771 3501.56,1773 2081,1775 1864,1779 981,1787 1401,1787 896,1799 1610,1799 1970,1803 1188,1810 3421,1819 189,1825 379,1825 568,1825 759,1825 3288,1832 840,1837 1180,1848 1600,1858 1398,1871 109,1885 299,1885 488,1885 679,1885 3361,1891 1375,1895 46,1897 1588,1908 1403,1914 1132,1918 3501.56,1923 921,1939 1098,1947 1791,1947 1061,1975 1829,1975 2135,1975 47,1979 237,1979 426,1979 617,1979 872,1981 1930,1991 2045,1995 1020,2021 46,2047 3501.56,2073 297,2088 486,2088 677,2088 992,2088 1836,2098 2000,2125 386,2135 3302,2135 564,2153 999,2179 1932,2219 264,2235 453,2235 644,2235 1795,2247 281,2329.13 411,2329.13 541,2329.13 671,2329.13 801,2329.13 931,2329.13 1061,2329.13 1267,2331 2522.08,2333.13 2656.23,2333.13 2790.38,2333.13 2924.54,2333.13 3058.69,2333.13 3192.85,2333.13 3327,2333.13 1583,2334 1717.15,2334 1851.31,2334 1985.46,2334 2119.62,2334 2253.77,2334 2387.92,2334 1480,2336
AVDD0: C62.1 C63.1 C77.1 R20.1 R25.1 R26.1 T3.2 U1.31 U1.33 | length 384.8
  Top Layer w10: U1.31@1935.43,979.42 1967,979.42 ; U1.33@1935.43,1018.79 1964,1018.79
  Top Layer w15: 1964,1018.79 1990.21,1018.79 2017,992 ; 1967,979.42 2014.58,979.42
  Bottom Layer w15: v1(2199,675) v1(2199,888)
AVDD1: C60.1 C61.1 C75.1 R21.1 R27.1 R28.1 T4.2 U1.37 U1.39 | length 834.2
  Top Layer w10: U1.37@1935.43,1097.53 1969,1097.53 ; U1.39@1935.43,1136.9 1963,1136.9
  Top Layer w15: 1963,1136.9 v1(2008.9,1136.9) ; 1969,1097.53 v1@2010,1097.53 ; 1973.85,1097.53 ccw(c1973.85,1144.15) v1@2006.82,1111.18
  Bottom Layer w15: v1@2008.9,1137 2008.9,1228.9 2100,1320 v1(2203,1320)
  Bottom Layer w30: v1@2008.9,1137 2008.9,1109.1 v1(2010,1108) 2081,1037 v1(2277,1037)
  other v1: 2250,1037
AVDD2: C70.1 C71.1 C78.1 R22.1 R29.1 R30.1 T5.2 U1.5 U1.7 | length 652.8
  Top Layer w10: v1@1553.95,1137.95 ccw(c1604.01,1188.01) U1.5@1604.01,1117.21 ; 1591.16,1077.84 U1.7@1614.57,1077.84
  Bottom Layer w15: 1352,1241 v1(1352,1319)
  Bottom Layer w30: v1(1268,1097.05) v1(1268,1134.56) 1268,1156 1352,1240 1352,1241 1515,1241 1549,1207 v1(1549,1133) v1(1549,1101)